# EAGLE board All_Board_1 (EAGLE 9.5.1)
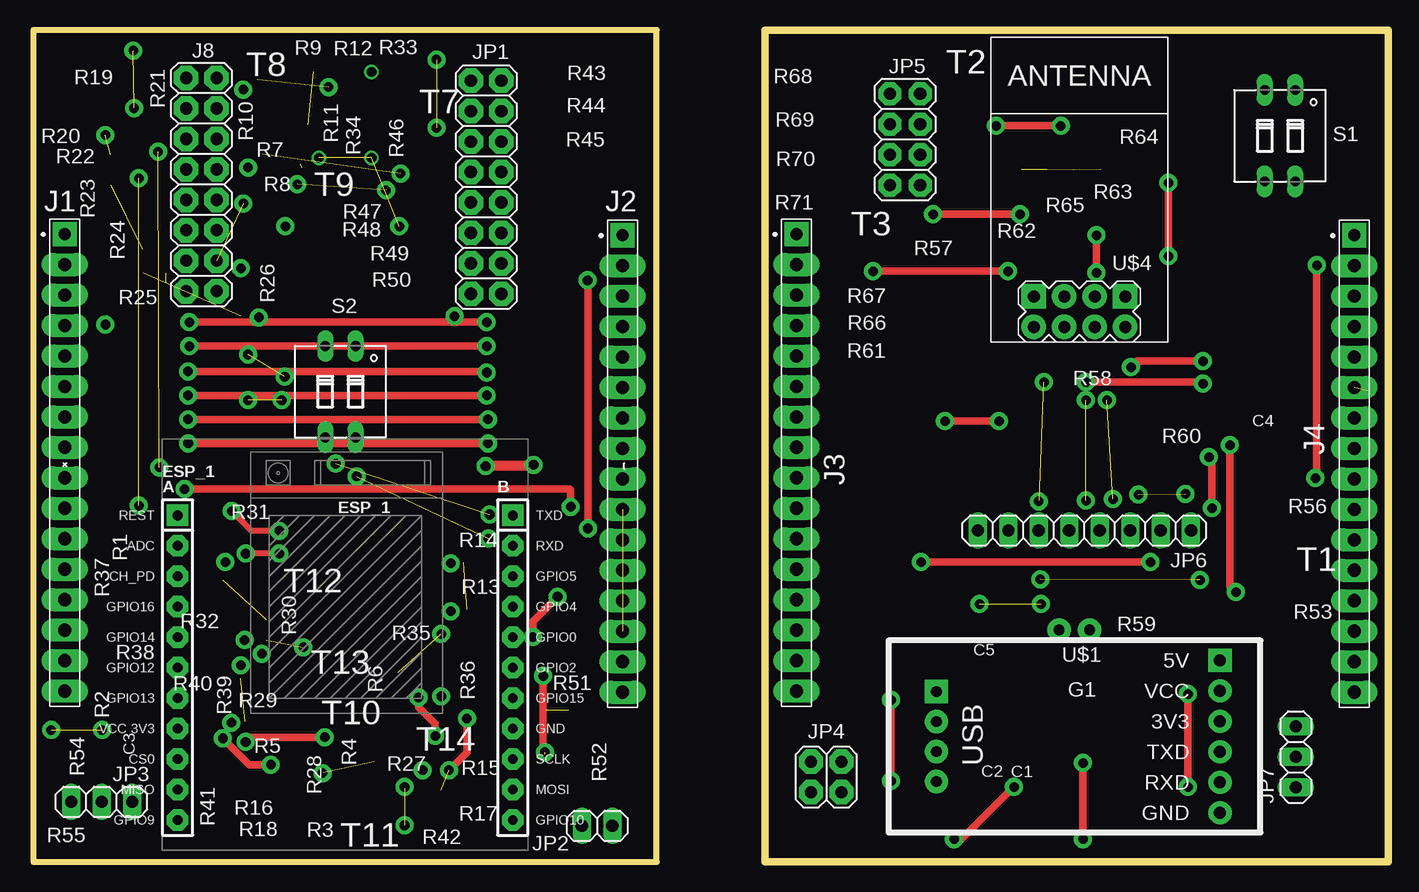
[diagram p0: board, top side]
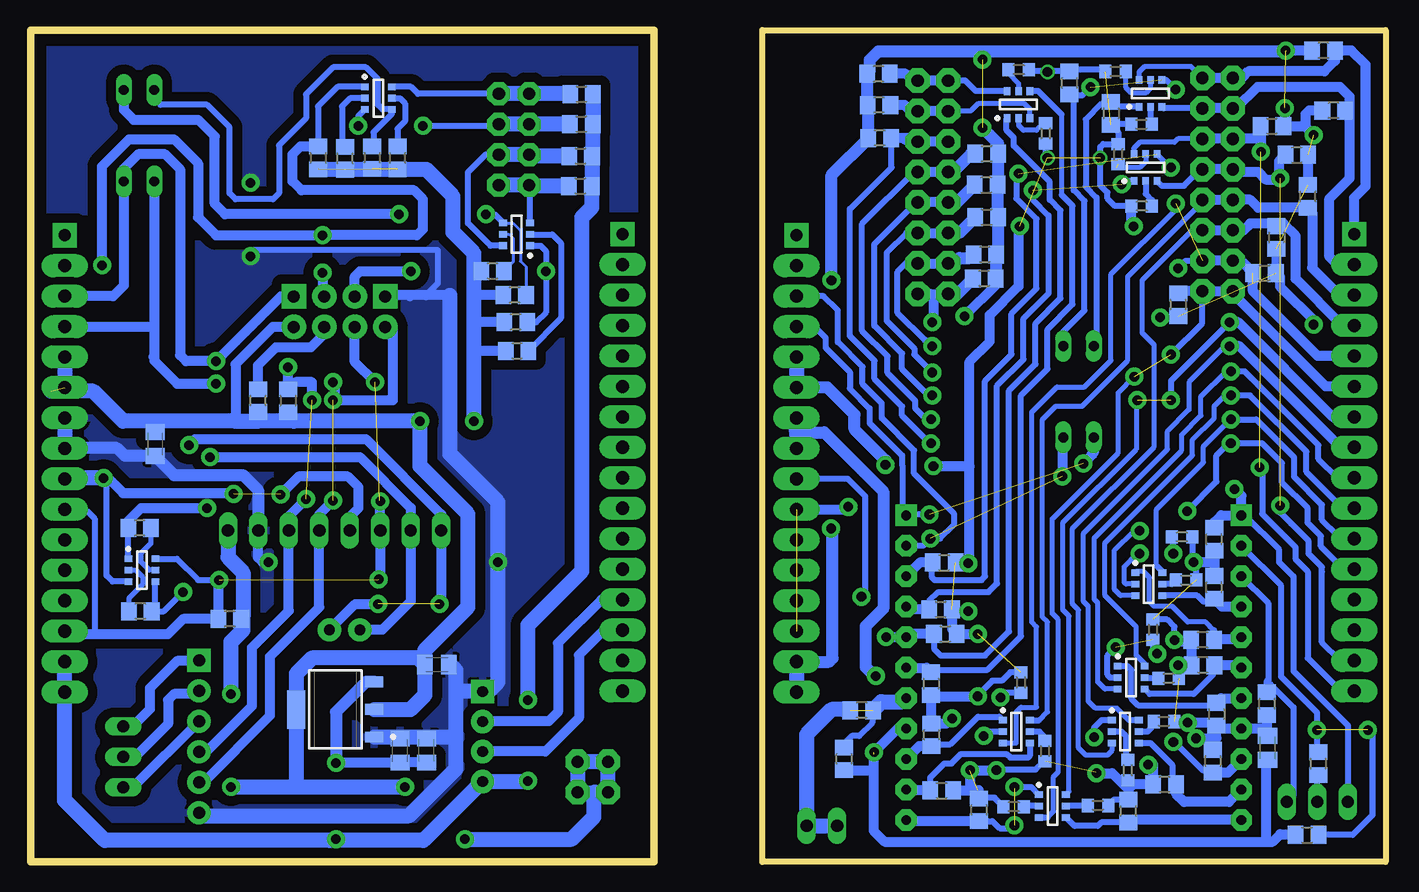
[diagram p1: board, bottom side, seen from below]

Size 112.97 x 69.36 mm. Coordinates in mm from the lower left corner, seen from the top.
Outline: 0,0 51.97,0 51.97,69.36 0,69.36 0,0
Outline: 61,0 112.97,0 112.97,69.36 61,69.36 61,0
Copper layers (1*16): Top 0.035mm / dielectric 1.5mm / Bottom 0.035mm
Design rules "default": minimum track width 6mil, minimum drill 0.35mm, track to track 6mil, track to pad 6mil, pad to pad 6mil, via to via 6mil, smd to smd 6mil, copper to edge 40mil, drill to drill 6mil, minimum pad ring 10mil, minimum via ring 8mil, stop-mask expansion 4mil, vias tented up to drill 0mil, thermal gap 10mil

## Footprints (pad centres in the part's own frame; a part is rotated, then mirrored left to right if it is on the bottom)
C0805K = smd 1.3 x 1.6: 1 -1,0; 2 1,0
ESP8266-12-ADAPTER = drill 0.813 pad 1.778 square: 1 -13.97,8.89; 9 13.97,8.89 | drill 0.813 pad 1.778 octagon: 2 -13.97,6.35; 3 -13.97,3.81; 4 -13.97,1.27; 5 -13.97,-1.27; 6 -13.97,-3.81; 7 -13.97,-6.35; 8 -13.97,-8.89; 10 13.97,6.35; 11 13.97,3.81; 12 13.97,1.27; 13 13.97,-1.27; 14 13.97,-3.81; 15 13.97,-6.35; 16 13.97,-8.89; 17 -13.97,-11.43; 18 -13.97,-13.97; 19 -13.97,-16.51; 20 13.97,-11.43; 21 13.97,-13.97; 22 13.97,-16.51
SOT230P700X170-4N-1 = smd 1.5 x 0.9: 1 -3.25,2.3; 2 -3.25,0; 3 -3.25,-2.3 | smd 1.5 x 3.2: 4 3.25,0
61301611121 = drill 1.016 pad 2.032 square: 1 -19.05,0 | drill 1.1 pad 1.93 long: 2 -16.51,0; 3 -13.97,0; 4 -11.43,0; 5 -8.89,0; 6 -6.35,0; 7 -3.81,0; 8 -1.27,0; 9 1.27,0; 10 3.81,0; 11 6.35,0; 12 8.89,0; 13 11.43,0; 14 13.97,0; 15 16.51,0; 16 19.05,0
2X08 = drill 1.016 pad 2.032 octagon: 1 -8.89,-1.27; 2 -8.89,1.27; 3 -6.35,-1.27; 4 -6.35,1.27; 5 -3.81,-1.27; 6 -3.81,1.27; 7 -1.27,-1.27; 8 -1.27,1.27; 9 1.27,-1.27; 10 1.27,1.27; 11 3.81,-1.27; 12 3.81,1.27; 13 6.35,-1.27; 14 6.35,1.27; 15 8.89,-1.27; 16 8.89,1.27
1X02 = drill 1.016 long: 1 -1.27,0; 2 1.27,0
1X03 = drill 1.016 long: 1 -2.54,0; 2 0,0; 3 2.54,0
2X02 = drill 1.016 pad 2.032 octagon: 1 -1.27,-1.27; 2 -1.27,1.27; 3 1.27,-1.27; 4 1.27,1.27
2X04 = drill 1.016 pad 1.93 octagon: 1 -3.81,-1.27; 2 -3.81,1.27; 3 -1.27,-1.27; 4 -1.27,1.27; 5 1.27,-1.27; 6 1.27,1.27; 7 3.81,-1.27; 8 3.81,1.27
1X08 = drill 1.016 long: 1 -8.89,0; 2 -6.35,0; 3 -3.81,0; 4 -1.27,0; 5 1.27,0; 6 3.81,0; 7 6.35,0; 8 8.89,0
R0805 = smd 1.3 x 1.5: 1 -0.95,0; 2 0.95,0
R0603 = smd 1 x 1.1: 1 -0.85,0; 2 0.85,0
DIP02YL = drill 0.813 long: 1 -1.27,-3.81; 2 1.27,-3.81; 3 1.27,3.81; 4 -1.27,3.81
INF-SC74 = smd 0.65 x 0.55: 1 -1.125,0.95; 2 -1.125,0; 3 -1.125,-0.95; 4 1.125,-0.95; 5 1.125,0; 6 1.125,0.95
USB-SERIAL-CH340 = drill 1 pad 1.93: 3V3 12.14,1.27; GND 12.14,-6.35; RXD 12.14,-3.81; TXD 12.14,-1.27; VCC 12.14,3.81 | drill 1 pad 1.93 square: 5V 12.14,6.35 | drill 0.9 pad 1.93: D+ -11.5,1.25; D- -11.5,-1.25; DTR 1.27,8.89; PLUS -11.5,-3.75; RTS -1.27,8.89 | drill 0.9 pad 1.93 square: MINUS -11.5,3.75
WIRELESS-WIFI-ESP-01 = drill 1 pad 2.032 square: A1 -8.89,3.81; D1 -8.89,-3.81 | drill 1 pad 2.032: A2 -11.43,3.81; B1 -8.89,1.27; B2 -11.43,1.27; C1 -8.89,-1.27; C2 -11.43,-1.27; D2 -11.43,-3.81

## Placement (x,y rotation side)
C1  100nF  [C0805K]  82.17,9.27 90 bottom
C2  10uF  [C0805K]  79.96,9.29 90 bottom
C3  100nF  [C0805K]  9.85,9.51 270 bottom
C4  100nF  [C0805K]  102.58,34.84 270 bottom
C5  10uF  [C0805K]  79.09,16.44 0 bottom
ESP_1  ESP8266-12-WITH-ADAPTER  [ESP8266-12-ADAPTER]  26,20 0 top
G1  [SOT230P700X170-4N-1]  87.56,12.71 180 bottom
J1  61301611121  [61301611121]  2.62,33.29 270 top
J2  61301611121  [61301611121]  49.12,33.2 270 top
J3  61301611121  [61301611121]  63.62,33.29 270 top
J4  61301611121  [61301611121]  110.12,33.2 270 top
J8  [2X08]  14.01,56.47 270 top
JP1  [2X08]  37.75,56.25 270 top
JP2  [1X02]  47,3 0 top
JP3  [1X03]  5.7,5 180 top
JP4  [2X02]  66.1,7.08 0 top
JP5  [2X04]  72.67,60.23 270 top
JP6  [1X08]  87.62,27.62 180 top
JP7  [1X03]  105.25,8.75 90 top
R1  10K  [R0805]  14.3,26.9 90 bottom
R2  10K  [R0805]  9.9,13.2 90 bottom
R3  4,7K  [R0603]  23.99,4.7 180 bottom
R4  4,7K  [R0603]  28.4,9.24 90 bottom
R5  4,7K  [R0603]  18.49,11.7 180 bottom
R6  4,7K  [R0603]  30.4,14.96 270 bottom
R7  4,7K  [R0603]  22.3,59.01 270 bottom
R8  4,7K  [R0603]  20.34,54.68 0 bottom
R9  4,7K  [R0603]  22.51,65.9 0 bottom
R10  4,7K  [R0603]  20.36,61.5 0 bottom
R11  10K  [R0805]  22.9,62.41 270 bottom
R12  10K  [R0805]  26.35,64.94 90 bottom
R13  10K  [R0805]  37.11,21.05 0 bottom
R14  10K  [R0805]  36.81,24.95 0 bottom
R15  10K  [R0805]  37.85,10.59 90 bottom
R16  10K  [R0805]  18.44,6.45 180 bottom
R17  10K  [R0805]  37.01,5.95 0 bottom
R18  10K  [R0805]  21.45,4.24 90 bottom
R19  10K  [R0805]  5.19,67.65 180 bottom
R20  10K  [R0805]  4.34,62.65 180 bottom
R21  10K  [R0805]  9.49,61.35 0 bottom
R22  10K  [R0805]  7.41,58.95 0 bottom
R23  10K  [R0805]  6.5,55.49 90 bottom
R24  10K  [R0805]  9.1,52.06 270 bottom
R25  10K  [R0805]  10.11,49.1 0 bottom
R26  10K  [R0805]  17.3,46.46 270 bottom
R27  4,7K  [R0603]  31.01,4.6 0 bottom
R28  4,7K  [R0603]  21.5,7.64 90 bottom
R29  4,7K  [R0603]  18.09,15.3 180 bottom
R30  4,7K  [R0603]  19.4,19.36 270 bottom
R31  4,7K  [R0603]  16.99,27.1 180 bottom
R32  4,7K  [R0603]  16.64,23.5 180 bottom
R33  4,7K  [R0603]  30.59,66.05 180 bottom
R34  4,7K  [R0603]  28.35,60.74 90 bottom
R35  10K  [R0805]  36.71,19 0 bottom
R36  10K  [R0805]  37.9,14.86 270 bottom
R37  10K  [R0805]  14.3,22.89 90 bottom
R38  10K  [R0805]  15.26,18.5 180 bottom
R39  10K  [R0805]  14.1,12.31 270 bottom
R40  10K  [R0805]  15.24,16.4 180 bottom
R41  10K  [R0805]  14.4,8.39 90 bottom
R42  10K  [R0805]  33.9,4.34 90 bottom
R43  10K  [R0805]  42.29,65.7 180 bottom
R44  10K  [R0805]  42.24,63.1 180 bottom
R45  10K  [R0805]  42.19,60.35 180 bottom
R46  10K  [R0805]  33.26,59.05 0 bottom
R47  10K  [R0805]  33.31,56.45 0 bottom
R48  10K  [R0805]  33.26,53.75 0 bottom
R49  10K  [R0805]  33.41,50.65 0 bottom
R50  10K  [R0805]  33.46,48.65 0 bottom
R51  5,2K  [R0805]  43.69,12.65 180 bottom
R52  10K  [R0805]  45.15,8.59 90 bottom
R53  10K  [R0805]  103.82,20.9 180 bottom
R54  400K  [R0805]  5.64,8.2 270 bottom
R55  100K  [R0805]  6.55,2.24 0 bottom
R56  10K  [R0805]  103.87,27.83 180 bottom
R57  4,7K  [R0805]  74.45,49.27 0 bottom
R58  47K  [R0805]  91.5,38.44 270 bottom
R59  10K  [R0805]  96.36,20.25 180 bottom
R60  10K  [R0805]  94,38.46 90 bottom
R61  4,7K  [R0805]  72.41,42.61 0 bottom
R62  4,7K  [R0805]  82.36,58.69 90 bottom
R63  4,7K  [R0805]  86.73,58.66 90 bottom
R64  10K  [R0805]  89,58.69 270 bottom
R65  10K  [R0805]  84.5,58.72 270 bottom
R66  10K  [R0805]  72.51,45 180 bottom
R67  10K  [R0805]  72.61,47.25 180 bottom
R68  10K  [R0805]  67.04,64 0 bottom
R69  10K  [R0805]  67.06,61.5 0 bottom
R70  10K  [R0805]  67.11,58.85 0 bottom
R71  10K  [R0805]  67.14,56.35 0 bottom
S1  [DIP02YL]  103.93,60.54 180 top
S2  [DIP02YL]  25.6,39.2 180 top
T1  BC817U  [INF-SC74]  103.69,24.32 0 bottom
T2  BC817U  [INF-SC74]  83.98,63.67 0 bottom
T3  BC817U  [INF-SC74]  72.45,52.33 180 bottom
T7  BC817U  [INF-SC74]  30.61,63.14 90 bottom
T8  BC817U  [INF-SC74]  19.61,64.07 90 bottom
T9  BC817U  [INF-SC74]  20.01,57.9 90 bottom
T10  BC817U  [INF-SC74]  21.71,10.86 0 bottom
T11  BC817U  [INF-SC74]  27.78,4.66 0 bottom
T12  BC817U  [INF-SC74]  19.75,23.16 0 bottom
T13  BC817U  [INF-SC74]  21.22,15.36 0 bottom
T14  BC817U  [INF-SC74]  30.79,10.86 0 bottom
U$1  USB-SERIAL-CH340  [USB-SERIAL-CH340]  86.79,10.45 0 top
U$4  WIRELESS-WIFI-ESP-01  [WIRELESS-WIFI-ESP-01]  87.21,56.04 90 top

## Library data of the parts
C1-C5 = rcl; SPICEPREFIX: C
ESP_1 = esp8266_with_adapter
G1 = infineon
J1-J4 = Headers; CREATED_BY: PCBLayout.com; DIGIKEY_PART_NUMBER: 732-5327-ND; MANUFACTURER: Wurth Electronics Inc.; MPN: 61301611121
J8 JP1-JP3 JP5-JP7 = pinhead
JP4 = pinhead; SPICEPREFIX: E
R1-R71 = rcl; SPICEPREFIX: R
S1 S2 = switch-dil; OC_FARNELL: unknown; OC_NEWARK: unknown
T1-T3 T7-T14 = transistor
U$1 U$4 = diy-modules

## Nets
+3V1: C4.1 C5.1 G1.2 G1.4 J4.5 J4.6 JP4.1 JP4.2 JP4.3 JP4.4 JP6.1 R57.1 R58.2 R59.1 R60.1 R61.1 R62.1 R63.1 R64.2 R65.2 R66.2 R67.2 U$4.D2
+3V3: C3.1 ESP_1.8 J2.5 J2.6 R1.1 R2.1 R3.1 R4.1 R5.1 R6.1 R7.1 R8.1 R9.1 R10.1 R11.2 R12.2 R13.2 R14.2 R15.2 R16.2 R17.2 R18.2 R27.1 R28.1 R29.1 R30.1 R31.1 R32.1 R33.1 R34.1 R35.2 R36.2 R37.2 R38.2 R39.2 R40.2 R41.2 R42.2
+5V: J2.15 J2.16 R19.2 R20.2 R21.2 R22.2 R23.2 R24.2 R25.2 R26.2 R43.2 R44.2 R45.2 R46.2 R47.2 R48.2 R49.2 R50.2
+5V1: C1.1 C2.1 G1.3 J4.15 J4.16 R68.2 R69.2 R70.2 R71.2 U$1.PLUS
ADC: ESP_1.2 R54.1 R55.2
D+: J1.13
D+1: J3.13 U$1.D+
D-: J1.14
D-1: J3.14 U$1.D-
DTR: JP6.8 R53.1 T1.4 U$1.DTR
ENABLE: ESP_1.3 JP3.1 R2.2
ENABLE1: R60.2 U$4.C2
GND: C3.2 ESP_1.16 J2.7 J2.8 R52.1 R55.1
GND1: C1.2 C2.2 C4.2 C5.2 G1.1 J4.7 J4.8 JP6.2 U$1.GND U$1.MINUS U$4.A1
GPIO0: ESP_1.13 J2.9 R35.1 T7.1
GPIO1: R11.1 S2.2 T8.1
GPIO2: ESP_1.14 R36.1 T7.4
GPIO3: R12.1 S2.1 T8.4
GPIO4: ESP_1.12 R13.1 T9.1
GPIO5: ESP_1.11 R14.1 T9.4
GPIO6: ESP_1.20 R15.1 T14.1
GPIO7: ESP_1.18 R16.1 T10.4
GPIO8: ESP_1.21 R17.1 T14.4
GPIO9: ESP_1.19 R18.1 T11.4
GPIO10: ESP_1.22 R42.1 T11.1
GPIO11: ESP_1.17 R41.1 T10.1
GPIO12: ESP_1.6 R40.1 T13.4
GPIO13: ESP_1.7 R39.1 T13.1
GPIO14: ESP_1.5 R38.1 T12.1
GPIO15: ESP_1.15 JP2.1 JP2.2 R51.1 R51.2 R52.2
GPIO16: ESP_1.4 R37.1 T12.4
GPIO17: J4.9 JP6.5 R64.1 T1.3 T2.1 U$4.C1
GPIO18: R66.1 T3.1 U$4.B1
GPIO19: R65.1 S1.2 T2.4
GPIO20: R67.1 S1.1 T3.4
LED_A1: J1.9 JP1.11 JP1.12 R48.1 T13.3
LED_A2: J1.10 JP1.9 JP1.10 R47.1 T13.6
LED_A3: J1.11 JP1.7 JP1.8 R46.1 T12.6
LED_A4: J1.12 JP1.5 JP1.6 R45.1 T12.3
LL1: J1.1 J8.1 J8.2 R19.1 T8.6
LL2: J1.2 J8.3 J8.4 R20.1 T8.3
LL3: J1.3 J8.9 J8.10 R23.1 T14.6
LL4: J1.4 J8.11 J8.12 R24.1 T10.3
LL5: J1.5 J8.13 J8.14 R25.1 T14.3
LL6: J1.6 J8.15 J8.16 R26.1 T11.3
LL7: J1.7 JP1.15 JP1.16 R50.1 T11.6
LL8: J1.8 JP1.13 JP1.14 R49.1 T10.6
LL9: JP5.1 JP5.2 R68.1 T2.6
LL10: JP5.3 JP5.4 R69.1 T2.3
N$1: JP1.3 JP1.4 R44.1 T7.3
N$2: JP3.2 R54.2
N$3: JP1.1 JP1.2 R43.1 T7.6
N$4: R34.2 T7.2
N$5: R56.1 T1.5
N$6: R10.2 T8.2
N$7: R9.2 T8.5
N$8: R33.2 T7.5
N$9: R53.2 T1.2
N$10: JP7.3 U$1.5V
N$11: JP7.2 U$1.VCC
N$12: R8.2 T9.2
N$13: JP7.1 U$1.3V3
N$14: R32.2 T12.5
N$15: R31.2 T12.2
N$16: R7.2 T9.5
N$17: R63.2 T2.2
N$18: R62.2 T2.5
N$19: R61.2 T3.2
N$20: R6.2 T14.2
N$21: R57.2 T3.5
N$22: R30.2 T13.2
N$24: R29.2 T13.5
N$26: R5.2 T10.5
N$27: R28.2 T10.2
N$28: R4.2 T14.5
N$31: R27.2 T11.2
N$33: R3.2 T11.5
RESET: ESP_1.1 J2.10 J2.14 JP3.3 R1.2
RESET1: J4.10 J4.14 JP6.6 R59.2 T1.6 U$4.B2
RTS: JP6.7 R56.2 T1.1 U$1.RTS
RXD: ESP_1.9 J2.4 S2.3
RXD1: J4.4 JP6.4 S1.3 U$1.RXD U$4.A2
SCL: J1.15 J8.7 J8.8 R22.1 T9.3
SCL1: JP5.7 JP5.8 R71.1 T3.3
SDA: J1.16 J8.5 J8.6 R21.1 T9.6
SDA1: JP5.5 JP5.6 R70.1 T3.6
TXD: ESP_1.10 J2.3 S2.4
TXD1: J4.3 JP6.3 R58.1 S1.4 U$1.TXD U$4.D1

## Tracks (layer width: path | path; a pad name or v marks a point on that pad's centre or on a via)
+3V1  (via drill 0.8 pad 1.5)  (4 unrouted)
  Top 0.61: v96.25,14 v96.25,6.25 | v81.75,6.25 77.07,1.57 v76.75,1.89 | v80.5,36.75 v76,36.75
  Bottom 0.813: R59.1 95.14,19.98 | U$4.D2 92.77,44.61 95.88,41.51 95.88,36.75 | R67.2 76,47.25 | 75.98,43.52 76,43.5 | R66.2 76,45 | 76,42.5 75.89,42.61 R61.1 | R60.1 94,36.75 | 91.5,37.25 R58.2 91,36.99 91,36.75 91.5,37.25
  Bottom 1.016: R57.1 75.73,49.27 76,49
  Bottom 1.27: G1.2 81.29,12.71 80.09,13.91 C5.1 | G1.4 90.81,15.69 89.5,17 80.65,17 C5.1 | G1.4 90.81,11.94 | v96.25,14 96.25,18.34 95.28,19.31 95.28,20.12 R59.1 95.25,20.41 95.25,24.12 96.52,25.39 JP6.1 | C5.1 80.09,17.66 76.5,21.25 76.5,29 80.5,33 v80.5,36.75 91,36.75 94,36.75 95.88,36.75 103,36.75 | G1.4 90.81,6.56 90.5,6.25 | v96.25,6.25 90.5,6.25 | 90.5,6.25 v81.75,6.25 | v76.75,1.89 67.86,1.89 66,3.75 66,5.75 | 66,5.75 65.94,5.81 JP4.1 JP4.2 JP4.4 JP4.3 67.31,5.75 66,5.75 | 111.25,39.25 107.75,39.25 105.25,36.75 103,36.75 | C4.1 102.58,36.33 103,36.75 | v76,36.75 76,42.5 76,43.5 76,45 76,47.25 76,49 76,50.75 77.75,52.5 77.75,55.5 79.99,57.74 R64.2 | J4.5 J4.6
+3V3  (via drill 0.8, 0.8 pad 1.5)  (9 unrouted)
  Top 0.508: 32.6,7.5 v32.45,7.65
  Top 0.61: v36.15,11.95 36.15,9.15 v34.65,7.65 | v19.8,8.1 18,8.1 v15.8,10.3
  Top 0.813: v41.7,33.1 41.6,33 v37.7,33 | v24.1,7.4 24.15,7.45
  Bottom 0.508: R18.2 22.65,5.19 R3.1 | R27.1 32.6,5.34 33.95,5.34 | R28.1 21.5,6.1 21.45,6.05 | R5.1 16.6,11.7 v16.5,11.6 | R4.1 28.51,8.39 29.2,7.7 32.4,7.7 v32.45,7.65 | R6.1 31.29,15.81 32,15.1 32.8,15.1 34,13.9 v34,13.8 | R29.1 17.3,15.36 v17.3,16.4 | v17.6,18.5 17.6,19.6 18.21,20.21 R30.1 | R32.1 15.79,24.79 v16,25 16.14,25.14 R31.1 | 21.21,61.3 R10.1 22.86,61.5 R11.2 | R9.1 23.56,66.1 26.14,66.1 R12.2 26.41,65.95 28.1,65.95 v28.2,65.85 28.3,65.95 29.64,65.95 R33.1 | R11.2 22.96,61.4 | R11.2 22.3,60.86 R7.1 | 21.21,54.7 R8.1 22.58,54.68 23.2,55.3 23.2,55.8 23.8,56.4 v23.8,58.7 23.8,59.6 23.54,59.86 R7.1 | 22.54,60.1 R7.1 | R34.1 28.35,58.85 v28.2,58.7
  Bottom 0.813: R2.1 9.9,10.56 C3.1 10.45,11.11 ESP_1.8 13.85,11.11 R39.2 | 37.1,33 v37.7,33 34.7,33 | R1.1 14.3,25 | 14.3,25 R37.2 | 21.45,6.05 R18.2 | 21.45,6.05 21.05,6.45 R16.2 19.39,8.1 v19.8,8.1 | R41.2 14.4,10.3 | R39.2 14.1,10.3 14.4,10.3 | v34.8,24.9 34.85,24.95 R14.2 34.7,24.95 34.7,33 | v34.8,20.9 36.01,20.9 R13.2 36.16,19.4 R35.2 v34,19 | v34,13.8 37.79,13.8 R36.2 37.9,11.59 R15.2 36.66,11.54 36.25,11.95 v36.15,11.95 | v32.45,7.65 v34.65,7.65 34.65,5.95 R17.2 | v24.1,7.4 22.8,7.4 21.45,6.05 | R42.2 33.95,5.34 33.95,6 34,5.95 | v15.8,10.3 14.4,10.3 | R39.2 14.34,11.6 v16.5,11.6 | v17.3,16.4 R40.2 16.21,16.42 R38.2 16.31,18.4 17.5,18.4 v17.6,18.5 | v16,25 14.3,25 | 34.7,33 34.7,41.7 33,43.4 33,45.6 30.6,48 30.6,52.9 v30.5,53 | v21,53 21.19,53.19 R8.1
  Bottom 1.016: v41.7,33.1 41.7,33.47 44.29,36.05 44.29,37.28 46.56,39.55 J2.6
  Bottom 1.27: J2.5 J2.6
+5V  (via drill 0.8 pad 1.5)  (6 unrouted)
  Top 0.61: v46.23,27.8 46.23,48.47
  Top 0.813: 46.23,48.47 v46.2,48.5
  Bottom 0.508: R26.2 17.41,45.4 v18.8,45.4
  Bottom 0.813: R23.2 6.46,56.48 R22.2 | R20.2 6.4,62.65 6.7,62.35 6.7,61.3 | 8.4,62.9 v8.4,62.84 8.4,61.49 | 8.4,61.49 R21.2 | R19.2 8.33,67.65 v8.35,67.64 | R24.2 9.1,49.16 R25.2 8.82,48.76 8.82,47.97 5.8,44.95 5.8,44.7 6,44.7 v6,44.8 | v6,60.6 6.7,61.3 | 8.4,61.49 8.21,61.3 6.7,61.3 | R50.2 32.51,48.09 v35.1,45.5
  Bottom 1.016: J2.15 46.41,16.69 46.1,17 46.1,27.8 v46.23,27.8 | v46.2,48.5 46.2,57.29 R45.2 43.14,63.05 R44.2 43.19,65.65 R43.2 43.01,65.93 43.01,66.87 42.3,67.58 33.6,67.58 | 32.2,59.16 R46.2 | R46.2 32.31,56.45 | 32.31,56.45 R47.2 | 33.6,67.58 8.33,67.58 | v33.6,66.9 33.6,67.58 | R50.2 32.51,50.6 R49.2 32.31,50.8 R48.2 32.31,56.45 | R46.2 32.31,59.91 v33.6,61.2
  Bottom 1.27: J2.15 J2.16
+5V1  (via drill 0.8 pad 1.5)
  Top 0.61: v87.5,8.25 v87.5,1.89 | v71.5,6.75 v71.5,13.5
  Top 1.016: v87.5,1.89 87.5,1.75
  Bottom 0.813: C2.1 82.15,8.29 C1.1 87.48,8.27 v87.5,8.25 | R69.2 66.22,61.6 | R71.2 66.04,56.5
  Bottom 1.016: G1.3 84.99,15.01 87.5,12.5 v87.5,8.25 | v87.5,1.89 87.89,1.89 88,1.78
  Bottom 1.27: J4.15 J4.16 110.12,5.12 106.78,1.78 88,1.78 80.21,1.78 U$1.PLUS 71.55,6.7 v71.5,6.75 | v71.5,13.5 71.5,19.75 67,24.25 67,53.75 66.17,54.59 66.17,56.33 | 66.17,56.33 R71.2 | R68.2 66.09,61.52 R69.2 66.11,58.9 R70.2 66.17,56.33
ADC  (via drill 0.8 pad 1.5)  (1 unrouted)
  Bottom 0.508: ESP_1.2 8.72,23.04 8.72,15.43 5.74,12.45 v5.74,11 5.74,9.25 R54.1 | v1.48,11 1.1,10.62 1.1,3.9 2.76,2.24 R55.2
D+1
  Bottom 0.813: J3.13 65.39,21.86 69,18.25 69,12.5 69.75,11.75 75.24,11.75 U$1.D+
D-1
  Bottom 0.813: J3.14 65.18,19.32 67.25,17.25 67.25,12 70.05,9.2 U$1.D-
DTR  (via drill 0.8 pad 1.5)  (1 unrouted)
  Top 0.61: v99.75,34.75 99.75,23 v100.25,22.5
  Bottom 0.508: T1.4 102.56,21.2 R53.1 101.85,20.9 v100.25,22.5
  Bottom 0.813: U$1.DTR 85.9,21.5 v84,21.5 | v99.75,34.75 99.25,35.25 85,35.25 78.73,28.98 JP6.8 78.73,21.64 v78.88,21.5
ENABLE
  Bottom 0.508: ESP_1.3 9.8,21.58 9.8,15 | 9.8,15 9.9,15.1 R2.2 | JP3.1 7.7,5.54 7.7,12.9 9.6,14.8 9.8,15
ENABLE1
  Bottom 0.813: R60.2 94,41.41 92.5,42.91 89.59,42.91 88.48,44.02 U$4.C2
GND  (via drill 0.8 pad 1.5)  (1 unrouted)
  Top 0.61: v42.5,15.5 42.5,9.3
  Top 1.016: 42.5,9.3 v42.65,9.15
  Bottom 0.813: 10,1.68 41.78,1.68 42.7,2.6 42.7,7.5 | 10,1.68 9.42,1.68 8.8,2.3 7.56,2.3 R55.1 | ESP_1.16 40.69,11.11 v42.65,9.15 | 42.65,8.95 42.7,8.9 42.7,7.5 | R52.1 42.84,7.64 42.7,7.5 | C3.2 10,8.36 10,1.68
  Bottom 1.016: 49.12,36 48.92,35.8 46.8,35.8 41.88,30.88 41.88,21.12 43.35,19.65 43.35,16.25 42.6,15.5 v42.5,15.5
  Bottom 1.27: J2.7 49.12,36 J2.8
GND1  (via drill 0.8 pad 1.5)
  Top 0.61: v74,25 v93.12,25 | v94.62,50.5 v94.62,56.62
  Bottom 0.508: 80,47.25 79,48.25 79,51 94.38,51 94.62,50.75 v94.62,50.5
  Bottom 0.813: 81.35,47.15 81.25,47.25 | 78,47.25 80,47.25 83.3,47.25 U$4.A1 | JP6.2 94,27.65 94,25.38 93.62,25 v93.12,25
  Bottom 1.016: 110.09,34.5 105.75,34.5 105.09,33.84 C4.2 101,32.25 95.25,32.25 94,31 94,27.65
  Bottom 1.27: U$1.GND 98.68,3.85 81.4,3.85 77.5,7.75 77.5,10.41 | G1.1 77.5,10.41 | C5.2 77.94,16.44 77.5,16 77.5,14 | 77.5,10.41 77.5,14 | 77.5,14 77.3,14.2 U$1.MINUS 74.8,14.2 74,15 v74,25 74,30 78,34 78,47.25 | J4.7 110.12,34.53 110.09,34.5
  pour Bottom (isolate 0.813): 61,69.36 61,0 112.97,0 112.97,69.36
GPIO0  (via drill 0.8 pad 1.5)
  Top 0.61: v41.65,18.75 41.65,20.05 v43.7,22.1
  Bottom 0.508: 41.67,18.73 v41.65,18.75 | J2.9 44.83,31.93 43.4,30.5 43.4,22.4 v43.7,22.1 | R35.1 37.66,17.76 37.1,17.2 33.4,17.2 31.4,19.2 31.4,39.3 29.2,41.5 29.2,44.9 27.1,47 27.1,54.3 28,55.2 28,56.7 31,59.7 31,60.4 31.6,61 31.6,61.98 T7.1
  Bottom 0.813: 41.67,18.73 ESP_1.13 39.7,19 R35.1
GPIO1
  Bottom 0.508: T8.1 22.48,62.95 R11.1 23.06,63.2 23.7,63.2 25,61.9 25,56.3 24.1,55.4 24.1,43.24 S2.2
GPIO2
  Bottom 0.406: 27,55.6 27,62.3
  Bottom 0.508: R36.1 37.8,15.81 37.6,16.01 33.19,16.01 30.4,18.8 30.4,38.9 28.2,41.1 28.2,44.4 26.1,46.5 26.1,54.7 27,55.6 | T7.4 28.96,64.27 27,62.3
  Bottom 0.813: ESP_1.14 38.28,16.19 R36.1
GPIO3  (via drill 0.8 pad 1.5)  (1 unrouted)
  Bottom 0.508: T8.4 18.3,65.19 v17.5,64.4 | v24.6,64.6 25.31,63.89 26,63.89 | R12.1 26,63.99 26,63.89 | S2.1 26.87,44.21 25.1,45.98 25.1,55.1 26,56 26,63.89
GPIO4  (via drill 0.8 pad 1.5)  (1 unrouted)
  Bottom 0.508: R13.1 38.06,21.74 37.3,22.5 33.1,22.5 32.4,23.2 32.4,39.7 30.2,41.9 30.2,45.3 28.1,47.4 28.1,53.9 29.4,55.2 v29.4,56 | T9.1 21.93,56.77 22,56.7 v22,56.5
  Bottom 0.813: R13.1 39.75,21.05 ESP_1.12
GPIO5  (via drill 0.8 pad 1.5)  (1 unrouted)
  Bottom 0.406: T9.4 17.93,57.9 v17.9,57.9
  Bottom 0.508: R14.1 37.86,24.85 37.86,23.76 37.6,23.5 33.7,23.5 33.4,23.8 33.4,40.1 31.2,42.3 31.2,45.7 29.1,47.8 29.1,53.6 30.8,55.3 30.8,57.2 v30.6,57.4
  Bottom 0.61: R14.1 38.01,25.2
  Bottom 0.813: R14.1 38.83,24.95 ESP_1.11
GPIO6
  Bottom 0.508: R15.1 37.69,9.8 36.3,9.8 33.99,12.11 32.22,12.11 T14.1
  Bottom 0.813: R15.1 38.9,9.64 ESP_1.20
GPIO7
  Bottom 0.508: R16.1 17.8,6.76 17.8,8.1 19.61,9.91 T10.4
  Bottom 0.813: ESP_1.18 13.06,5 16.8,5 17.49,5.69 R16.1
GPIO8
  Bottom 0.508: R17.1 37.96,7.04 36.8,8.2 36.2,8.2 35.4,9 31.6,9 31.3,8.7 29.8,8.7 29.66,8.84 T14.4
  Bottom 0.813: R17.1 39.89,5.95 ESP_1.21
GPIO9
  Bottom 0.508: R18.1 23.71,3.29 24,3 25.95,3 T11.4
  Bottom 0.813: ESP_1.19 21.25,3.49 R18.1
GPIO10  (via drill 0.8 pad 1.5)  (1 unrouted)
  Top 0.508: 30.95,6.15 30.9,6.2 v30.95,6.25
  Bottom 0.508: R42.1 33.21,3.39 33.2,3.4 32.8,3.4 32.2,2.8 31.1,2.8 30.9,3 v30.95,3.05 | v30.95,6.25 29.55,6.25 T11.1
  Bottom 0.813: R42.1 39.87,3.39 ESP_1.22
GPIO11  (via drill 0.8 pad 1.5)
  Top 0.508: v17.7,10 18.1,10.4 | 24.6,10.4 v24.3,10.4
  Top 0.61: v24.3,10.4 18.1,10.4
  Bottom 0.508: R41.1 14.56,7.6 15.2,7.6 17.6,10 v17.7,10 | T10.1 23.69,11.81 24.3,11.2 v24.3,10.4
  Bottom 0.813: ESP_1.17 13.16,7.44 R41.1
GPIO12
  Bottom 0.508: R40.1 14.4,16.29 14.4,15.6 16,14 19.68,14 T13.4
  Bottom 0.813: ESP_1.6 12.29,16.19 12.5,16.4 R40.1
GPIO13
  Bottom 0.508: R39.1 14.3,13.06 20.66,13.06 21.2,13.6 21.2,16 21.51,16.31 T13.1
  Bottom 0.813: R39.1 13.71,13.65 ESP_1.7
GPIO14
  Bottom 0.406: 14.31,19.31 15,20 16.5,20 17.8,21.3 19.3,21.3 19.7,21.7 19.7,23.7 20.2,24.2 20.79,24.2
  Bottom 0.508: R38.1 14.31,19.31 | 20.79,24.2 T12.1
  Bottom 0.813: ESP_1.5 12.27,18.73 12.4,18.6 14.21,18.6 R38.1
GPIO15  (1 unrouted)
  Bottom 0.508: R51.1 42.8,12.59 42.8,11.6 43.9,10.5 44.5,10.5 45.15,9.85 R52.2
  Bottom 1.27: R51.1 42.04,13.35 40.27,13.35 ESP_1.15 | R51.2 45.15,12.65 45.2,12.7 46.2,12.7 48.27,10.63 JP2.2 JP2.1
GPIO16
  Bottom 0.508: T12.4 15.71,22.21 15.2,21.7 14.54,21.7 R37.1
  Bottom 0.813: ESP_1.4 13.63,21.27 R37.1
GPIO17  (via drill 0.8 pad 1.5)  (1 unrouted)
  Top 0.61: v107,49.75 107,32.12 | v88.62,52.25 v88.62,49.12
  Top 0.813: v106.88,32 107,32.12
  Bottom 0.508: T2.1 87.38,64.62 89,63 R64.1 | T1.3 106.12,23.37 106.62,23.88 106.62,31.88 106.5,32
  Bottom 0.813: v106.88,32 106.5,32 105.25,30.75 96.12,30.75 | v107,49.75 107,58 104.75,60.25 101,60.25 99,58.25 99,53.75 97.5,52.25 v88.62,52.25 80.75,52.25 80.25,52.75 80.25,55.25 81,56 90.38,56 91.12,56.75 91.12,59 90.48,59.64 R64.1 | v88.62,49.12 88.62,47.3 U$4.C1 | JP6.5 86.36,28.77 85.62,29.5 85.62,31.25 86.5,32.12 90.62,32.12 v92.12,30.62
  Bottom 1.016: v96.05,30.68 96.12,30.75
  Bottom 1.27: v106.88,32 110.05,32 J4.9
GPIO18  (via drill 0.8 pad 1.5)
  Top 0.61: v81.25,49.25 v70,49.25
  Bottom 0.508: U$4.B1 86,47.21 | T3.1 70.45,51.38 70,50.93 v70,49.25 70,45.81 70.81,45 R66.1
  Bottom 0.813: v81.25,49.25 85.5,49.25 85.94,48.81 U$4.B1
GPIO19
  Bottom 0.508: R65.1 84.38,59.79 84.38,60.83 82.86,62.34 T2.4 82.89,62.75 83.62,62.75 84,63.12 84,65.25 85,66.25 87.75,66.25 90,64 90,62 92.25,59.75 92.25,55.75 92.75,55.25 95.88,55.25 96.38,55.75 96.38,61.25 98.25,63.12 102.12,63.12 102.75,63.75 102.75,64.25 102.75,64.44 S1.2
GPIO20  (via drill 0.8 pad 1.5)
  Top 0.61: v75,54 v82.25,54
  Bottom 0.254: R67.1 71.66,49.61 72.13,50.08 72.13,52.62 72.76,53.25 73.55,53.25
  Bottom 0.406: T3.4 73.55,53.25
  Bottom 0.508: T3.4 74.3,54 v75,54
  Bottom 0.813: v82.25,54 96.75,54 97.61,54.86 97.61,60.49 99,61.88 104.38,61.88 105.2,62.7 S1.1
LED_A1  (via drill 0.8 pad 1.5)
  Top 0.61: v12.9,40.9 37.7,40.9
  Top 0.813: 37.7,40.9 v37.8,40.8
  Bottom 0.406: T13.3 23.41,14.41 24,15 24,21.6 24.3,21.9 24.3,27 17,34.3 17,35.6 15.4,37.2 15.4,38.8 13.3,40.9
  Bottom 0.508: JP1.12 39.96,52.44 41.62,50.78 41.62,45.12 39.3,42.8 39.3,42.3 v37.8,40.8 37.8,40.9 | J1.9 3.98,32.02 4,32 5.6,33.6 5.6,34.75 11.75,40.9 12.8,40.9 13.3,40.9 | 34,53.96 R48.1
  Bottom 0.813: JP1.11 JP1.12 39.08,52.5 | 12.8,40.9 v12.9,40.9
  Bottom 1.016: R48.1 35.46,52.5 36.42,52.5 JP1.11
LED_A2  (via drill 0.8 pad 1.5)
  Top 0.61: v12.9,38.9 v37.8,38.9
  Bottom 0.406: 20.09,16.5 20.8,17.2 20.8,19.6 23.4,22.2 23.4,26.6 16.1,33.9 16.1,35.2 14.3,37 14.3,38 13.4,38.9 v12.9,38.9
  Bottom 0.508: v37.8,38.9 38.14,38.9 40.32,41.08 40.32,42.38 42.63,44.7 42.63,51.51 39.16,54.98 JP1.10 | J1.10 3.58,29.48 6.62,32.52 6.62,34.2 11.32,38.9 v12.9,38.9 | T13.6 20.09,16.5
  Bottom 0.813: J1.10 2.66,29.44 | v12.9,38.9 12.72,38.9 | JP1.10 39.04,55 36.5,55 JP1.9
  Bottom 1.016: R47.1 35.71,55 36.5,55
LED_A3  (via drill 0.8 pad 1.5)
  Top 0.61: v12.9,36.9 v37.9,36.9
  Bottom 0.406: 12.94,36.9 15.2,34.64 15.2,33.3 19.1,29.4 19.1,24.7
  Bottom 0.508: v37.9,36.9 38.3,36.9 39.21,37.81 39.21,38.44 41.54,40.76 41.54,42.16 43.65,44.27 43.65,53.21 39.34,57.52 JP1.8 | 3.5,26.95 3.5,26.8 2.76,26.8 2.66,26.9 | J1.11 2.88,27.2 4,27.2 5.31,28.51 5.31,29.78 7.63,32.09 7.63,33.73 10.8,36.9 v12.9,36.9 12.94,36.9 | T12.6 18.62,24.23 19.1,24.7
  Bottom 0.813: 2.66,26.9 J1.11 | JP1.7 JP1.8
  Bottom 1.016: JP1.7 36.08,57.52 34.55,59.05 R46.1
LED_A4  (via drill 0.8 pad 1.5)
  Top 0.508: v20.5,27.6 18.2,27.6 v16.55,29.25
  Top 0.61: v12.91,34.89 v37.89,34.89
  Top 0.813: v37.89,34.89 v37.9,34.9
  Bottom 0.406: T12.3 22.11,22.21 22.6,22.7 22.6,26 21,27.6 v20.5,27.6
  Bottom 0.508: 37.9,35.16 v37.9,34.9 38,34.9 40.31,37.21 40.31,37.98 42.6,40.26 42.6,41.79 44.66,43.85 44.66,54.43 41.2,57.89 41.2,60.31 R45.1 | 40.14,60.06 JP1.6 | J1.12 3.5,24.4 5.4,26.3 5.4,27.16 6.5,28.26 6.5,29.5 8.65,31.65 8.65,33.25 10.29,34.89 v12.91,34.89 12.91,34.81 12.9,34.8 13.2,34.8 14.1,33.9 14.1,31.7 v16.55,29.25
  Bottom 0.813: J1.12 3.6,24.4 | JP1.5 JP1.6 39.31,60.35 R45.1
LL1
  Bottom 0.406: J8.2 16.22,66.3 20.1,66.3 20.56,65.84 T8.6
  Bottom 0.813: J8.2 J8.1 12.01,65.36 11.45,65.92 5.1,65.92 4.24,66.78 R19.1 2.85,67.65 1.68,66.48 1.68,56.32 2.62,55.38 J1.1
LL2
  Bottom 0.508: R20.1 3,62.26 | J8.4 18.54,62.82 T8.3
  Bottom 0.813: J8.4 J8.3 12.48,62.82 10.7,64.6 3.8,64.6 3,63.8 3,62.26 3,57 4.7,55.3 4.7,50.45 4.05,49.8 J1.2
LL3
  Bottom 0.406: 28.89,11.81 28.2,12.5 28.2,20 28.6,20.4 28.6,36.9 27.5,38 25.3,38 21.5,41.8 21.5,48.78 15.28,55
  Bottom 0.508: T14.6 28.89,11.81 | 15.28,55.12 J8.10 15.28,55
  Bottom 0.813: J1.3 3.86,47.26 6.12,49.52 6.12,54.16 R23.1 10.64,54.54 11.3,55.2 J8.9 J8.10
LL4
  Bottom 0.406: T10.3 22.84,9.27 23.2,8.9 25,8.9 25.6,9.5 25.6,21 26.1,21.5 26.1,27.8 19.3,34.6 19.3,43.1 20.3,44.1 20.3,48.5 16.14,52.66
  Bottom 0.508: 16.14,52.66 15,52.66
  Bottom 0.813: 3.92,44.72 J1.4 3.34,44.72 3.38,44.68 3.56,44.68 7.5,48.62 7.5,52.2 8.52,53.22 9,53.22 | 15.64,52.66 J8.12 15,52.66 J8.11 11.86,52.66 11.3,53.22 9,53.22 | R24.1 9,53.11 9,53.22
LL5  (via drill 0.8 pad 1.5)  (2 unrouted)
  Bottom 0.406: T14.3 30.8,9.91 30.8,12.5 30.4,12.9 29.1,12.9 29.1,19.6 29.5,20 29.5,37.5 27.4,39.6 25.1,39.6 22.9,41.8 22.9,49 17.5,54.4
  Bottom 0.508: v17.3,49.5 16.68,50.12 J8.14 | 17.5,54.4 v17.5,54.9
  Bottom 0.813: J8.13 J8.14 | J8.13 12.62,50 11.96,50 R25.1 | 3.7,42.18 J1.5 5.67,42.18 11.06,47.57 11.06,48.27 | 12.74,49.95 J8.13
LL6  (via drill 0.8 pad 1.5)  (1 unrouted)
  Bottom 0.406: 28.19,3.71 27.7,4.2 27.7,7.1 27.3,7.5 27.3,20.2 27.8,20.7 27.8,28.6 22.3,34.1 22.3,39.1 v20.95,40.45
  Bottom 0.508: T11.3 28.19,3.71 | v17.9,42.3 15.3,44.9 15.3,47.56 J8.16
  Bottom 0.813: 3.8,39.64 J1.6 5,39.64 12.74,47.38 J8.15 J8.16 17.13,47.58 R26.1
LL7  (via drill 0.8 pad 1.5)  (1 unrouted)
  Top 0.61: v13,45 v37.8,45
  Bottom 0.406: T11.6 26.4,5.87 26.4,20.5 26.9,21 26.9,28.3 20.8,34.4 20.8,38.4 v20.7,38.5
  Bottom 0.508: v17.9,38.5 17.9,40.1 v13,45
  Bottom 0.813: J1.7 2.66,37.06 4.36,37.06 12.3,45 v13,45 | v37.8,45 37.7,45.1 37.7,47.1 37.96,47.36 JP1.16 JP1.15
  Bottom 1.016: JP1.15 35.7,47.36 R50.1
LL8  (via drill 0.8 pad 1.5)
  Top 0.61: v13,42.99 v37.79,42.99
  Bottom 0.406: 21.41,11.81 22.4,12.8 24.2,12.8 24.8,13.4 24.8,21.3 25.2,21.7 25.2,27.4 18.2,34.4 18.2,35.9 16.4,37.7 16.4,40 13.41,42.99
  Bottom 0.508: v37.79,42.99 38.29,43.49 38.43,43.49 40.7,45.76 40.7,49.2 39.9,50 39.12,50 | T10.6 21.41,11.81 | v13,42.99 13.41,42.99
  Bottom 0.813: J1.8 3.76,34.56 12.2,43 v13,43 v13,42.99 | 39.12,50 JP1.14 JP1.13
  Bottom 1.016: JP1.13 35.98,49.9 35.53,50.35 34.66,50.35 R49.1
LL9
  Bottom 0.508: 74,64.04 JP5.2 80.67,64.04 81.25,64.62 T2.6
  Bottom 0.813: JP5.1 71.36,64
  Bottom 1.27: R68.1 68.03,64.04 JP5.1 74,64.04
LL10  (via drill 0.8 pad 1.5)
  Top 0.61: v85.66,61.38 v80.25,61.38
  Bottom 0.508: JP5.4 74,61.5 74.12,61.38 v80.25,61.38 | T2.3 85.62,62.2 85.62,61.38 v85.66,61.38
  Bottom 1.27: R69.1 JP5.3 74,61.5
N$1
  Bottom 0.406: T7.3 29.66,62.76 30.1,63.2 34,63.2 34.6,62.6 JP1.3
  Bottom 0.813: JP1.3 JP1.4 39.6,62.6 40.1,63.1 R44.1
N$2
  Bottom 0.508: JP3.2 5.7,7.19 R54.2
N$3
  Bottom 0.508: 36.46,65.16 JP1.1 35.04,65.14 34.16,64.27 T7.6
  Bottom 0.813: JP1.1 JP1.2 39.44,65.14 40,65.7 R43.1
N$4
  Bottom 0.406: T7.2 30.61,61.41 30.2,61 29.1,61 28.51,61.59
  Bottom 0.508: R34.2 28.51,61.59
N$5
  Bottom 0.406: T1.5 103.07,24.32 103.75,25 103.75,25.75 102.92,26.58 R56.1
  Bottom 0.61: 102.75,27.66 R56.1
N$6
  Bottom 0.508: T8.2 19.61,61.6 R10.2
N$7
  Bottom 0.406: T8.5 19.61,64.49 20,64.1 21.2,64.1 21.66,64.56 R9.2
N$8
  Bottom 0.406: 31.44,65.74 30.6,64.9 T7.5
  Bottom 0.508: R33.2 31.44,65.74 | T7.5
N$9
  Bottom 0.406: T1.2 104.19,24.32 103.62,23.75 103.62,23.12 104.77,21.98 R53.2
N$10
  Bottom 0.813: U$1.5V 98.98,16.75 100.75,16.75 103,14.5 103,12.75 104.46,11.29 JP7.3
N$11
  Bottom 0.813: 98.99,14.26 U$1.VCC 99.19,14 101,14 101.5,13.5 101.5,11.5 104.25,8.75 JP7.2
N$12
  Bottom 0.508: T9.2 20.01,55.71 19.49,55.19 R8.2
N$13
  Bottom 0.813: 99.18,11.72 U$1.3V3 104.44,6.21 JP7.1
N$14
  Bottom 0.508: R32.2 17.83,23.16 T12.5
N$15  (via drill 0.8 pad 1.5)
  Top 0.508: v20.5,25.7 v17.7,25.7
  Bottom 0.406: T12.2 21.66,23.16 21.8,23.3 21.8,24.6 20.7,25.7
  Bottom 0.508: 20.7,25.7 v20.5,25.7 | v17.7,25.7 17.7,26.96 R31.2
N$16  (1 unrouted)
  Bottom 0.406: T9.5 20.01,58.39 20.5,57.9 22.4,57.9
  Bottom 0.508: R7.2 22.4,58.16
N$17
  Bottom 0.508: T2.2 86.33,63.67 87,63 87,59.88 R63.2
N$18
  Bottom 0.508: T2.5 82.17,63.67 81.75,63.25 81.75,61.75 82.38,61.12 82.38,59.66 R62.2
N$19
  Bottom 0.508: T3.2 71.31,52.31 69.46,52.31 68.75,51.6 68.75,45.32 R61.2
N$20  (via drill 0.8 pad 1.5)
  Top 0.61: v33.5,10.5 33.5,11.5 32.1,12.9 v32.1,13.7
  Bottom 0.508: T14.2 33.14,10.86 v33.5,10.5 | R6.2 31.69,14.11 v32.1,13.7
N$21
  Bottom 0.254: T3.5 73.08,52.33 72.75,52 72.75,50.02 R57.2
  Bottom 0.406: T3.5 73.5,52.25
N$22  (via drill 0.8 pad 1.5)  (1 unrouted)
  Top 0.508: 18.95,17.45 v19.05,17.35
  Bottom 0.508: T13.2 22.96,15.36 23.2,15.6 23.2,17.2 v22.5,17.9 | R30.2 19.4,17.7 v19.05,17.35
N$24
  Bottom 0.508: R29.2 20.04,15.3 T13.5
N$26
  Bottom 0.508: R5.2 19.5,11.54 19.5,11.22 19.86,10.86 T10.5
N$27
  Bottom 0.508: R28.2 21.67,8.66 21.67,10.53 22.01,10.86 T10.2
N$28
  Bottom 0.508: R4.2 28.4,10.4 28.86,10.86 T14.5
N$31
  Bottom 0.508: 30.21,4.65 30.2,4.66 | T11.2 30.2,4.66 | R27.2 30.22,4.66 30.2,4.66
N$33
  Bottom 0.508: R3.2 24.84,4.66 T11.5
RESET  (via drill 0.8 pad 1.5)  (1 unrouted)
  Top 0.61: v44.8,29.6 44.8,31 44.72,31.08 v12.6,31.08
  Bottom 0.508: JP3.3 3.16,11.37 7.7,15.91 7.7,23.8 8.88,24.98 8.88,26.03 11.73,28.89 ESP_1.1
  Bottom 0.813: v12.6,31.08 12.58,31.08 12.03,30.53 ESP_1.1 13.71,28.89 14.3,28.3 R1.2 | J2.10 47.52,29.39 47.51,29.4 45,29.4 v44.8,29.6
RESET1  (via drill 0.8 pad 1.5)  (3 unrouted)
  Bottom 0.508: T1.6 100.77,25.27 99,23.5 97,23.5 | J4.10 109.98,29.25 108.25,29.25 107.62,28.62 107.62,19
  Bottom 0.813: v97.25,23.5 97.25,23 97.31,22.94 R59.2 100.25,20.25 101.5,19 107.62,19 109.89,19 J4.14 | v84.25,40 85.94,41.69 U$4.B2 | 83.88,30.12 v83.81,30.07 JP6.6 83.81,23.56 83.88,23.5 v83.94,23.56
RTS  (via drill 0.8 pad 1.5)
  Top 0.61: v98,33.75 98.25,33.5 v98.25,29.5
  Bottom 0.508: T1.1 R56.2
  Bottom 0.61: R56.2
  Bottom 0.813: U$1.RTS 83.66,19.34 81.28,21.73 JP6.7 81.28,29.52 85.5,33.75 v98,33.75 | R56.2 104.82,28.43 103.75,29.5 v98.25,29.5
RXD  (via drill 0.8 pad 1.5)  (1 unrouted)
  Bottom 0.508: 48.4,44.6 49.09,44.6 J2.4 47.63,44.63 46.7,43.7 46.7,42.88 44.68,40.86 44.68,39.47 43.02,37.8 43.02,36.58 40.33,33.89 40.33,33.05 40.27,32.99 40.27,29.19 ESP_1.9 39.86,29 38,29 v38.04,28.96
  Bottom 0.813: S2.3 24.33,34.09 24.6,33.82 24.6,33.8 v25.2,33.2
RXD1  (via drill 0.8 pad 1.5)  (1 unrouted)
  Top 0.61: v87.75,40 97.38,40 v97.5,39.88
  Bottom 0.813: v97.5,39.88 100.75,39.88 102.66,41.78 102.66,42.16 | S1.3 102.66,44.62 | 102.66,44.62 102.66,42.16 | 102.73,42.09 102.66,42.16 | J4.4 102.67,44.63 102.66,44.62 | U$4.A2 82.75,44.61 82.75,38.5 v87.75,38.5 87.62,38.62 87.62,39.88 v87.75,40 | U$1.RXD 98.56,6.64 93,12.2 93,17.12 88.89,21.23 JP6.4 88.89,28.98 v87.75,30.12
SCL  (via drill 0.8 pad 1.5)  (1 unrouted)
  Bottom 0.508: J1.15 2.64,16.8 3.8,16.8 5.31,18.31 5.31,24.18 | 5.32,24.18 5.31,24.18 | 5.31,24.18 5.31,24.58 6.42,25.68 6.42,26.74 7.87,28.2 | 7.87,28.2 7.9,28.2 | 7.87,28.2 8.8,29.13 v8.8,29.7 | J8.8 15.46,57.74 16.82,56.38 18.66,56.38 T9.3
  Bottom 0.813: J8.8 J8.7 12.54,57.54 10.64,57.54 10,56.9 8.9,56.9 | 8.9,56.9 v8.8,57 | R22.1 8.9,58.41 8.9,56.9
SCL1
  Bottom 0.508: T3.3 71.33,56.34
  Bottom 0.813: R71.1 68.16,56.42 | 71.33,56.34 JP5.7
  Bottom 1.27: R71.1 71.33,56.35 JP5.7 JP5.8
SDA  (via drill 0.8 pad 1.5)  (1 unrouted)
  Bottom 0.406: J8.6 17.32,60.28 17.6,60 20.5,60 21,59.5 21,59.06
  Bottom 0.508: J1.16 3.74,14.24 6.5,17 6.5,24.23 7.53,25.26 7.53,26.24 10.3,29.01 10.3,32.7 v10.5,32.9 | 21,59.06 T9.6
  Bottom 0.813: J8.6 J8.5 10.48,60.28 10.4,60.2 v10.4,59.2 10.4,61.31 R21.1
SDA1
  Bottom 0.508: T3.6 74.63,51.38 76.5,53.25 76.5,57.5 75,59 73.98,59
  Bottom 0.813: 71.29,58.85 JP5.5 | 73.98,59 JP5.6
  Bottom 1.27: R70.1 71.29,58.85 | JP5.5 JP5.6
TXD  (via drill 0.8 pad 1.5)  (1 unrouted)
  Bottom 0.508: J2.3 46.85,47.17 45.68,46 45.68,43.33 43.62,41.27 43.62,39.84 42,38.23 42,37 39.31,34.31 39.31,32.37 36,29.06 36,28.1 37.15,26.95 v37.95,26.95 38.55,26.35 ESP_1.10
  Bottom 0.813: 27,35.26 S2.4 26.95,35.31 v26.95,32.15
TXD1  (via drill 0.8 pad 1.5)  (1 unrouted)
  Top 0.61: v97.5,41.75 92,41.75 v91.5,41.25
  Bottom 0.813: 89.5,39 v89.5,38.5 89.5,40 90.89,40 R58.1 v91.5,41.25 | J4.3 106.08,47.17 105.2,48.05 S1.4 105.2,57.8 104,59 101.75,59 100.5,57.75 100.5,42.25 100,41.75 v97.5,41.75 92.1,47.15 U$4.D1 | U$1.TXD 98.32,9.18 94.5,13 94.5,17.88 91.44,20.94 JP6.3 91.44,28.82 v90,30.25

## Text on the board
tTest: ANTENNA | TX | RX | ESP-01
Reference: GPIO - ON | GPIO1 | TXD0 | GPIO0 | GPIO0 | RXD0 | GPIO3 | GPIO2 | TXD1 | GPIO1 | SDA | GPIO4 | GPIO16 | WAKE | GPIO2 | SCL | GPIO5 | GPIO14 | SCLK | GPIO3 | GPIO6 | GPIO13 | MOSI | GPIO7 | GPIO12 | MISO | GPIO8 | GPIO11 | GPIO9 | GPIO10 | GPIO1,3 ON | DTR | RTS | RESET | GPIO0 | TX | RX | GND | 3,3V | USB - UART | ESP8266-07 | 5V | CS | VCC | RESET | ADC 0-5V | CH_PD | 3,3V | ESP8266-12 | GPIO15 | 3,3V